# Altium PCB PCB_verticallanding_2024-01-02.pcbdoc
Units mil, origin at the board's own origin, x right, y up, seen from the top; angles counter-clockwise.
Board outline 4540 x 4185 mil, 2 copper layers (Top Layer, Bottom Layer); 88 components, 64 nets, 309 pads, 122 vias.
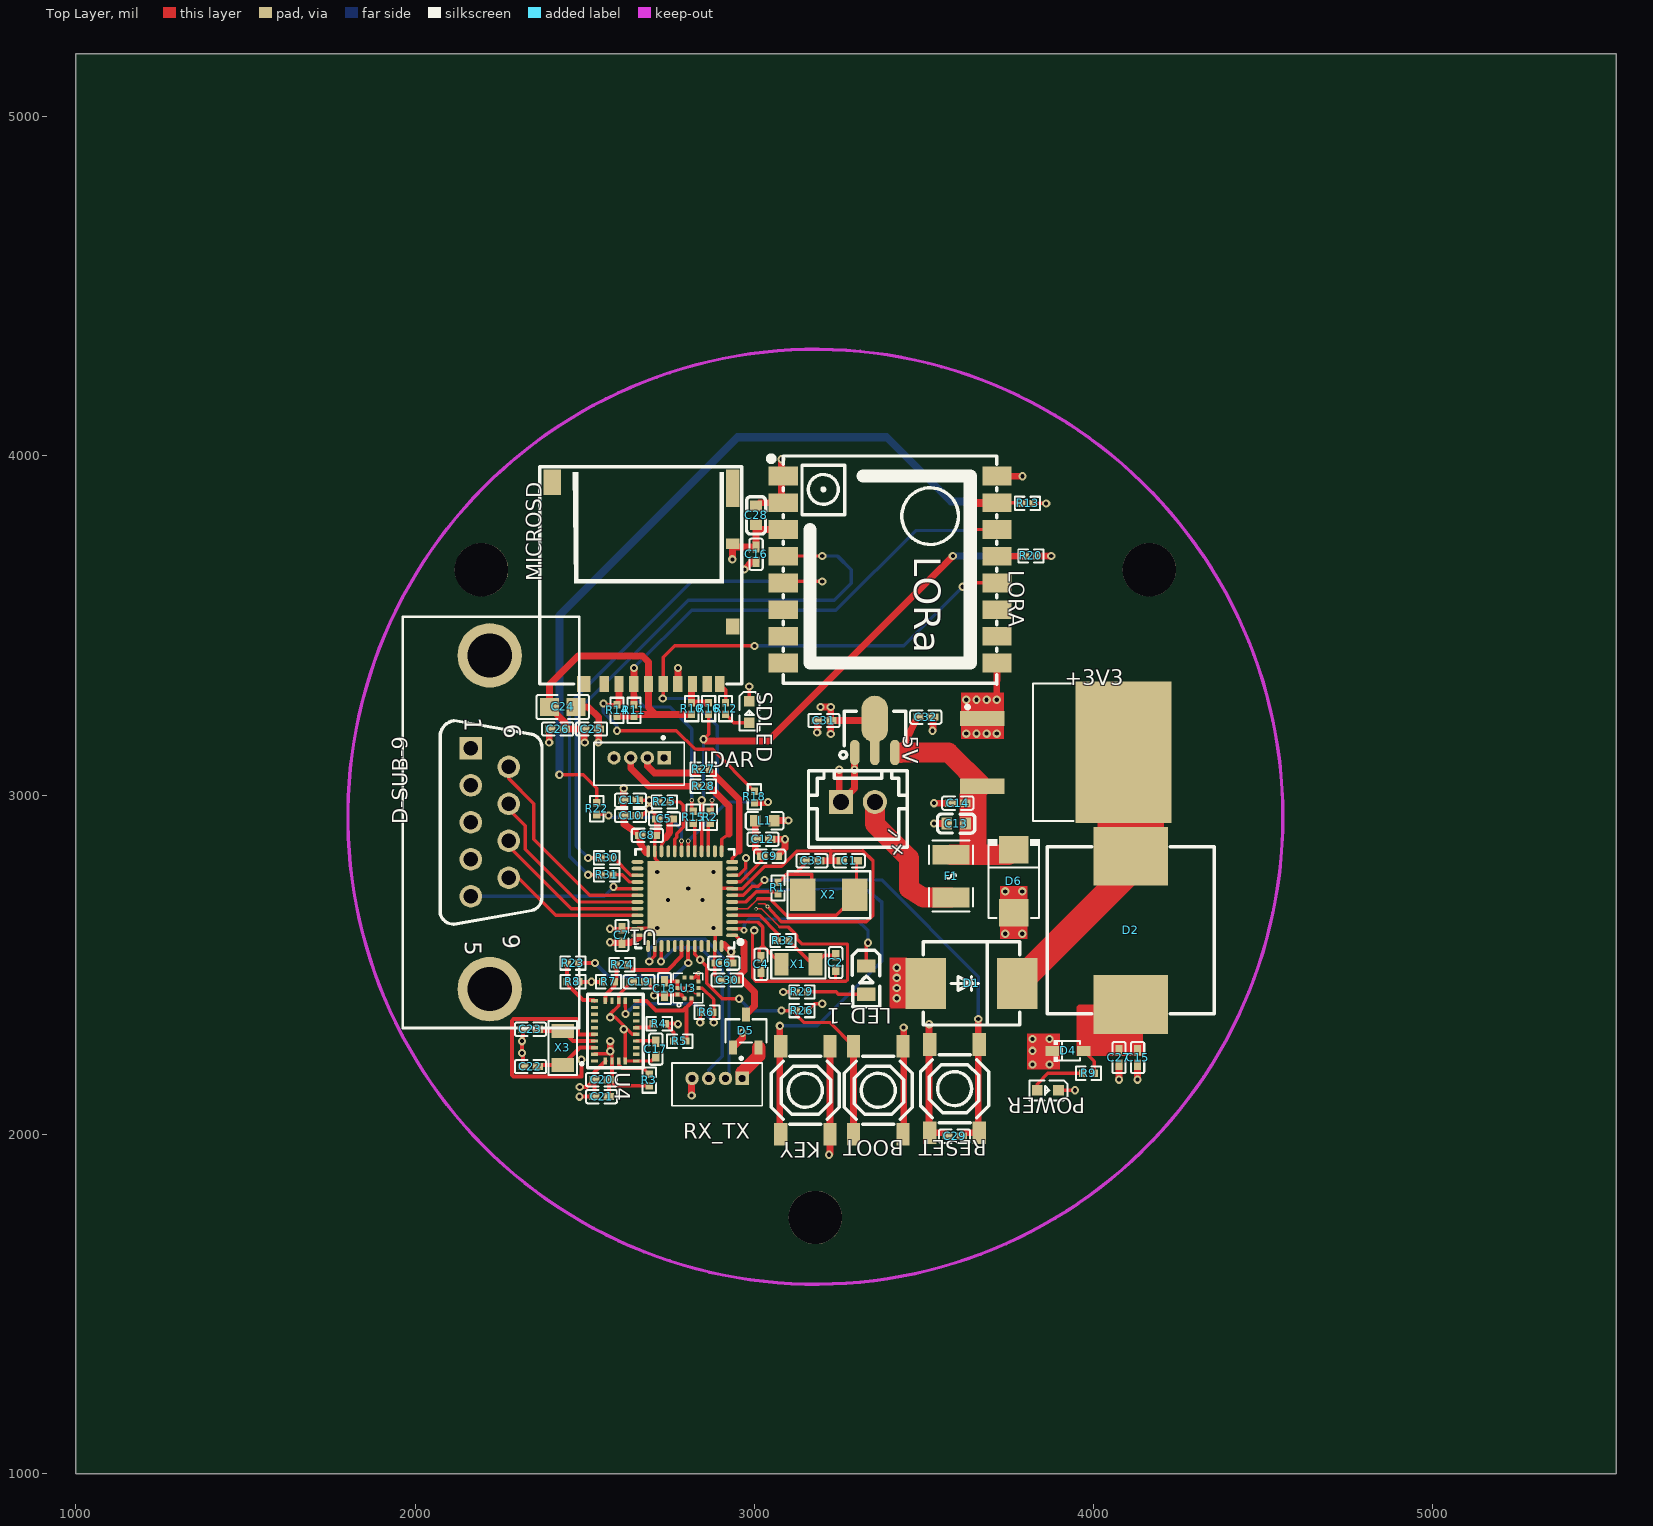
[diagram p0: Top Layer view]
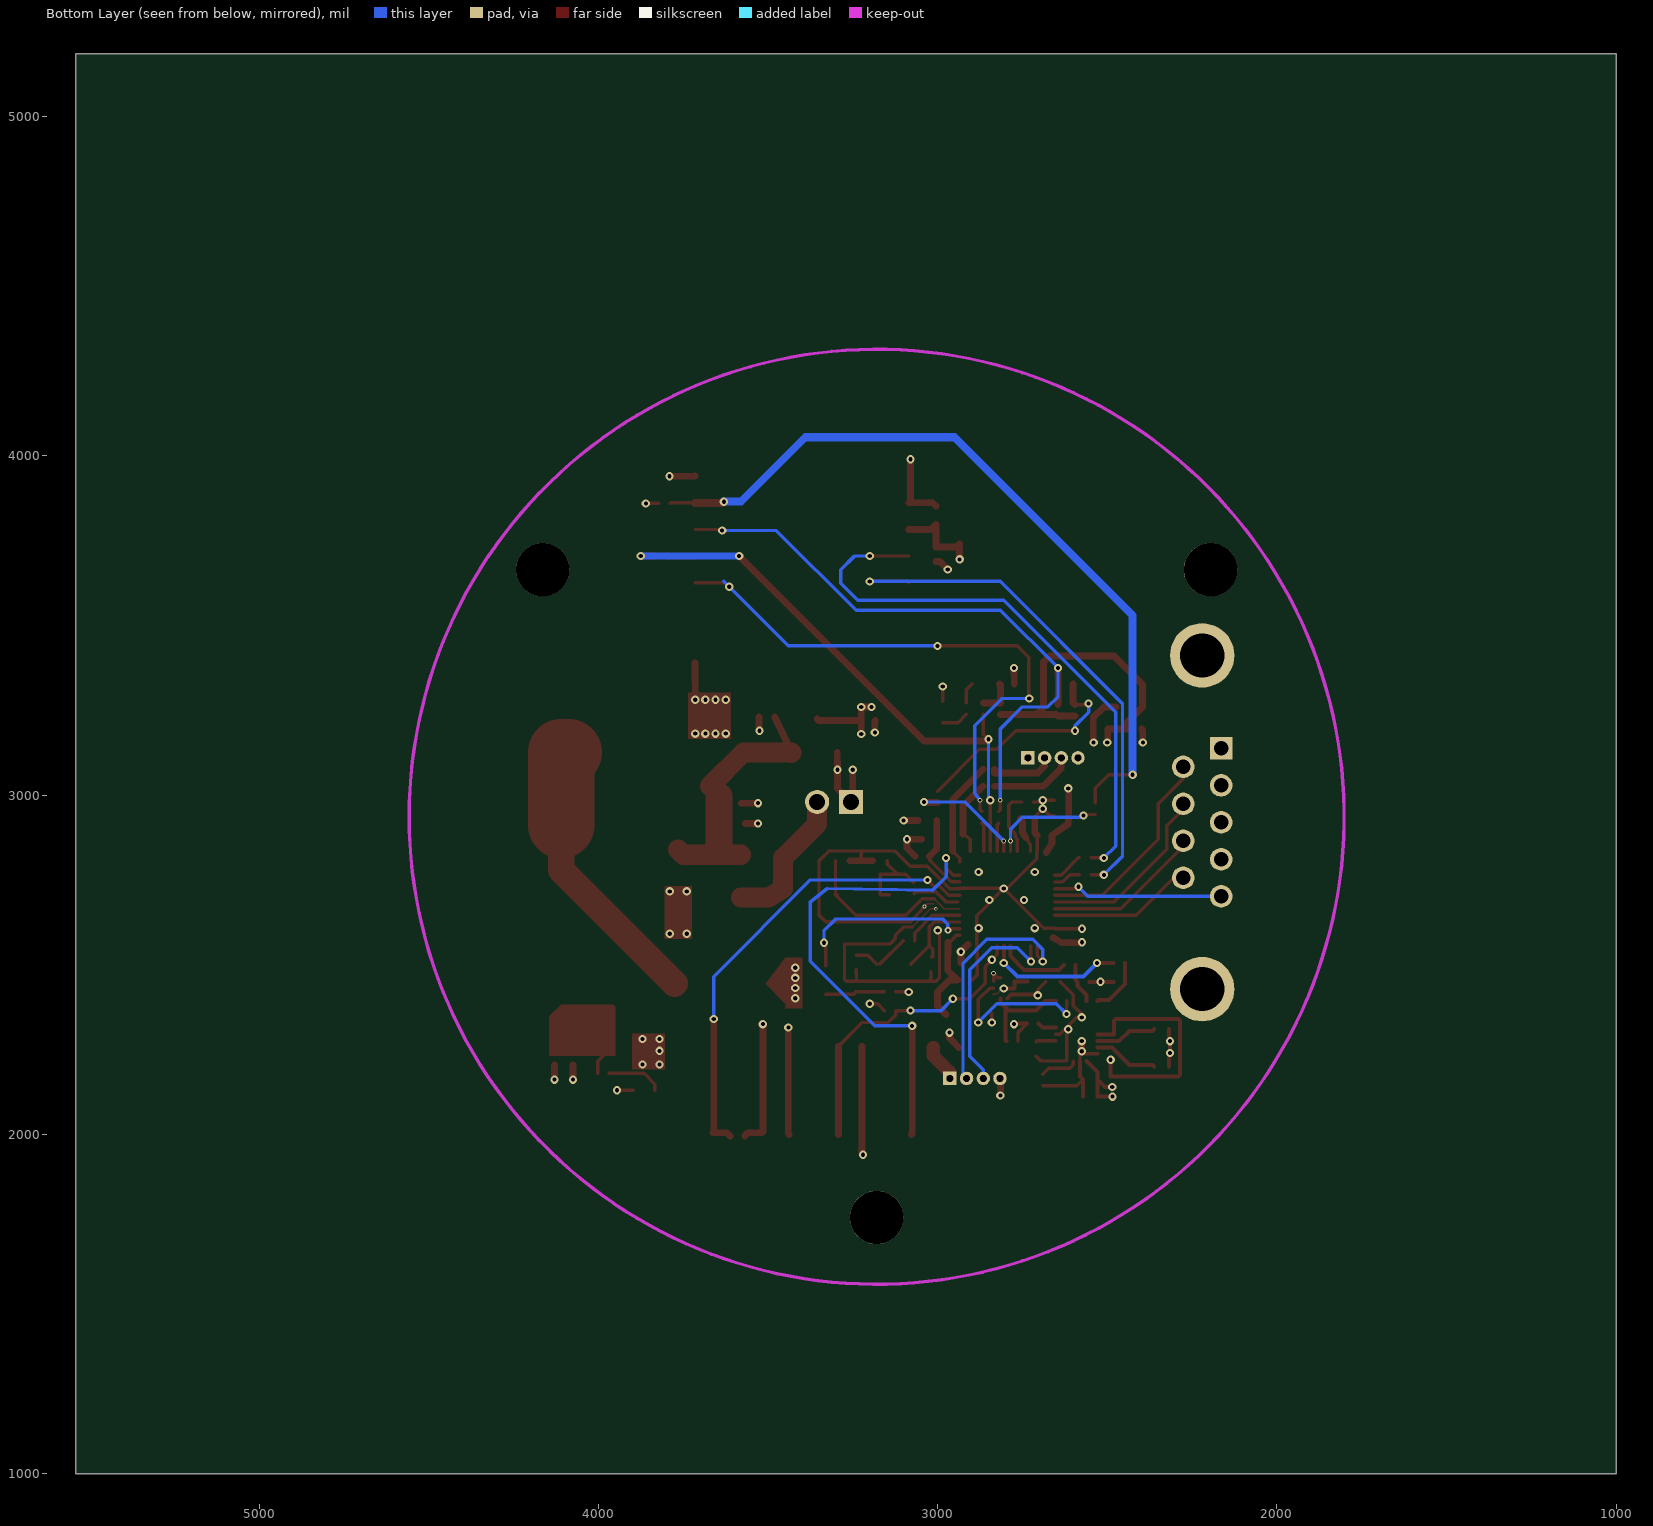
[diagram p1: Bottom Layer view, seen from below]

## Layer stack, top to bottom
Top Layer: signal copper (thickness not stored)
Dielectric: dielectric 12.6, FR-4, Dk 4.8
Bottom Layer: signal copper (thickness not stored)

## Board outline
5540,1000 1000,1000 1000,5185 5540,5185

## Components (designator, comment, footprint, x,y, rotation, side; value= is the part's Value field where it differs from the comment)
5V "LM1117-5V" SOT-89-3_L4.5-W2.5-P1.50-LS4.1-BR 3355,3175 r270 top
+3V3 "LD1085D2T33R" TO-263-2_L10.0-W9.1-P5.08-LS15.2-TL 3879.53,3126.41 r0 top
+_ "POWER INPUT" CONN-TH_B2B-XH-A-GU 3305,2980 r180 top
BOOT "TS-1187A-B-A-B" SW-SMD_4P-L5.1-W5.1-P3.70-LS6.5-TL-2 3365,2130 r90 top
C1 "20pF" C0402 3279.53,2806.41 r0 top
C2 "10pF" C0402 3239.53,2506.41 r90 top
C4 "10pF" C0402 3019.53,2501.41 r90 top
C5 "4.7uF" C0402 2735,2930 r0 top
C6 "100nF" C0402 2910,2505 r0 top
C7 "100nF" C0402 2609.53,2586.41 r270 top
C8 "100nF" C0402 2684.53,2881.41 r180 top
C9 "100nF" C0402 3045,2820 r180 top
C10 "4.7uF" C0402 2635,2940 r0 top
C11 "4.7uF" C0402 2635,2985 r0 top
C12 "1uF" C0402 3025,2870 r180 top
C13 "10uF" C0603 3594.53,2916.41 r180 top
C14 "100nF" C0402 3599.53,2976.41 r0 top
C15 "10uF" C0402 4129.53,2226.41 r90 top
C16 "100nF" C0402 3005,3710 r90 top
C17 "100nF" C0402 2709.53,2251.41 r90 top
C18 "100nF" C0402 2735,2430 r270 top
C19 "100nF" C0402 2660,2450 r0 top
C20 "100nF" C0402 2549.53,2161.41 r0 top
C21 "100nF" C0402 2549.53,2111.41 r0 top
C22 "22pF" C0402 2340,2200 r180 top
C23 "22pF" C0402 2340,2310 r180 top
C24 "47uF" C0805 2435,3260 r0 top
C25 "1uF" C0402 2520,3195 r0 top
C26 "100nF" C0402 2420,3195 r0 top
C27 "100nF" C0402 4074.53,2226.41 r270 top
C28 "10uF" C0603 3005,3825 r90 top
C29 "100nF" C0402 3590,1995 r0 top
C30 "100nF" C0402 2920,2455 r180 top
C31 "10uF" C0402 3205,3220 r0 top
C32 "10uF" C0402 3505,3230 r0 top
C33 "20pF" C0402 3169.53,2806.41 r180 top
D1 "SS34" SMC_L7.1-W6.2-LS8.1-R-RD 3640,2445 r180 top
D2 "10uH" IND-SMD_L12.5-W12.5-SRR1280-150M 4109.53,2601.41 r270 top
D4 "BAT60JFILM" SOD-323_L1.8-W1.3-LS2.5-RD 3924.53,2246.41 r0 top
D5 "BAT54C" SOT-23-3_L2.9-W1.6-P1.90-LS2.8-BR 2975,2305 r270 top
D6 "S3A" SMB_L4.6-W3.6-LS5.3-RD 3764.53,2746.41 r270 top
D-SUB-9 "DS1034-09FUNSi44" DSUB-TH_2-5747706-0 2220,2920 r90 top
F1 "FUSE 3A PTC" F1210 3579.53,2761.41 r270 top
KEY "TS-1187A-B-A-B" SW-SMD_4P-L5.1-W5.1-P3.70-LS6.5-TL-2 3150,2130 r90 top
L1 "600Ω" L0603 3030,2925 r180 top
LED_1 "0805G (Green)" LED0805-R-RD 3330,2455 r270 top
LIDAR "LIDAR" MOLEX_0530470410 2660,3110 r0 top
LORA "RA-02" WIRELM-SMD_RA-02-BL 3400,3665 r270 top
MICROSD "DM3AT-SF-PEJM5" SD-SMD_DM3AT-SF-PEJM5 2670,3625 r180 top
POWER "POWER INDICATOR" LED0603-RD 3864.95,2129.99 r180 top
R1 "330Ω" R0402 3069.53,2726.41 r270 top
R2 "22Ω" R0402 2870,2935 r270 top
R3 "10kΩ" R0402 2690,2160 r90 top
R4 "10kΩ" R0402 2719.53,2326.41 r180 top
R5 "4.7kΩ" R0402 2780,2275 r0 top
R6 "4.7kΩ" R0402 2860,2360 r0 top
R7 "2.2kΩ" R0402 2570,2450 r180 top
R8 "2.2kΩ" R0402 2465,2450 r0 top
R9 "200Ω" R0402 3985,2180 r180 top
R10 "47kΩ" R0402 2815,3255 r90 top
R11 "47kΩ" R0402 2645,3250 r90 top
R12 "100Ω" R0402 2915,3255 r270 top
R13 "10kΩ" R0402 3805,3860 r0 top
R14 "47kΩ" R0402 2595,3250 r90 top
R15 "22Ω" R0402 2820,2935 r270 top
R16 "22Ω" R0402 2865,3255 r90 top
R18 "22Ω" R0402 3000,2995 r90 top
R20 "22Ω" R0402 3815,3705 r180 top
R22 "22Ω" R0402 2535,2960 r90 top
R23 "22Ω" R0402 2465,2505 r0 top
R24 "22Ω" R0402 2610,2500 r0 top
R25 "10kΩ" R0402 2735,2980 r0 top
R26 "10kΩ" R0402 3140,2365 r0 top
R27 "22Ω" R0402 2849.53,3076.41 r180 top
R28 "22Ω" R0402 2849.53,3026.41 r180 top
R29 "100Ω" R0402 3140,2420 r0 top
R30 "22Ω" R0402 2565,2815 r180 top
R31 "22Ω" R0402 2565,2765 r180 top
R32 "470Ω" R0402 3084.53,2571.41 r180 top
RESET "TS-1187A-B-A-B" SW-SMD_4P-L5.1-W5.1-P3.70-LS6.5-TL-2 3590,2135 r270 top
RX_TX "TTL" MOLEX_0530470410 2890,2165 r0 top
SDLED "KT-0603R" LED0603-RD 2985,3245 r270 top
U1 "STM32F411CEU6TR" UFQFPN-48_L7.0-W7.0-P0.50-BL-EP5.6 2795,2695 r90 top
U3 "BMP390" LGA-10_L2.0-W2.0-P0.50-BL 2804.53,2431.41 r0 top
U4 "BNO085" LGA-28_L5.2-W3.8-P0.50-BL-1 2589.99,2305 r0 top
X1 "32.768K-9F" CRYSTAL-SMD_L3.2-W1.5-1 3129.53,2501.41 r0 top
X2 "25MHz 18pF" OSC-SMD_2P-L5.0-W3.2 3219.53,2706.41 r180 top
X3 "32.768KHZ-12.5PF" CRYSTAL-SMD_L3.2-W1.5-1 2435,2255 r90 top

## Footprints (in the part's own frame and the unit in brackets; to place one, negate y for a bottom-side part, rotate by r counter-clockwise, add the part's x,y. Pads: shape width x height; smd on the part's side, far side on the other; paste and mask are expansions set on the pad)
C0402 [mm]
  rect 0.79x0.54 smd paste-100 mask+0.051: 1(-0.545,0) 2(0.545,0)
  silkscreen extent -1.17,-0.5 1.17,0.5
C0603 [mm]
  rect 0.8x0.9 smd paste+0 mask+0.051: 1(-0.7,0) 2(0.7,0)
  silkscreen extent -1.41,-0.71 1.39,0.72
C0805 [mm]
  rect 1.41x1.35 smd paste-100 mask+0.051: 1(-1,0) 2(1,0)
  silkscreen extent -1.96,-0.9 1.96,0.9
CONN-TH_B2B-XH-A-GU [mm]
  rect 1.8x1.8 hole 1.2 paste+0 mask+0.051: 1(1.27,0)
  round 1.8 hole 1.2 paste+0 mask+0.051: 2(-1.27,0)
  silkscreen extent -3.7,-2.35 3.7,3.4
CRYSTAL-SMD_L3.2-W1.5-1 [mm]
  rect 1.05x1.7 smd paste+0 mask+0.051: 1(-1.275,0) 2(1.275,0)
  silkscreen extent -2.03,-1.08 2.03,1.08
DSUB-TH_2-5747706-0 [mm]
  rect 1.69x1.69 hole 1.09 paste+0 mask+0.051: 1(5.54,1.42)
  round 1.69 hole 1.09 paste+0 mask+0.051: 2(2.77,1.42) 3(0,1.42) 4(-2.77,1.42) 5(-5.54,1.42) 6(4.155,-1.42) 7(1.385,-1.42) 8(-1.385,-1.42) 9(-4.155,-1.42)
  round 4.826 hole 3.302 paste+0 mask+0.051: 10(12.495,0) 11(-12.495,0)
  silkscreen extent -15.4,-6.7 15.4,6.51
F1210 [mm]
  rect 1.485x2.781 smd paste-100 mask+0.051: 1(-1.6,0) 2(1.6,0)
  silkscreen extent -2.67,-1.65 2.67,1.65
IND-SMD_L12.5-W12.5-SRR1280-150M [mm]
  rect 4.4x5.6 smd paste+0 mask+0.051: 1(-5.55,0) 2(5.55,0)
  silkscreen extent -6.25,-6.25 6.25,6.25
L0603 [mm]
  rect 0.8x0.864 smd paste-100 mask+0.051: 1(-0.7,0) 2(0.7,0)
  silkscreen extent -1.42,-0.65 1.41,0.67
LED0603-RD [mm]
  rect 0.8x0.8 smd paste+0 mask+0.051: 1(-0.799,-0.003) 2(0.799,0.004)
  silkscreen extent -1.49,-0.75 1.39,0.76
LED0805-R-RD [mm]
  rect 1x1.4 smd paste+0 mask+0.051: 1(1.05,0) 2(-1.05,0)
  silkscreen extent -2.22,-1.04 1.99,1.01
LGA-10_L2.0-W2.0-P0.50-BL [mm]
  rect 0.3x0.3 smd paste+0 mask+0.05: 1(-0.25,-0.78) 2(0.25,-0.78) 3(0.78,-0.5) 4(0.78,0) 5(0.78,0.5) 6(0.25,0.78) 7(-0.25,0.78) 8(-0.78,0.5) 9(-0.78,0) 10(-0.78,-0.5)
  silkscreen extent -1.1,-1.4 1.1,1.1
LGA-28_L5.2-W3.8-P0.50-BL-1 [mm]
  rect 0.5x0.25 smd paste+0 mask+0.051: 1(-1.563,-2.25) 6(1.563,-2.25) 7(1.563,-1.75) 8(1.563,-1.25) 9(1.563,-0.75) 10(1.563,-0.25) 11(1.563,0.25) 12(1.563,0.75) 13(1.563,1.25) 14(1.563,1.75) 15(1.563,2.25) 20(-1.563,2.25) 21(-1.563,1.75) 22(-1.563,1.25) 23(-1.563,0.75) 24(-1.563,0.25) 25(-1.563,-0.25) 26(-1.563,-0.75) 27(-1.563,-1.25) 28(-1.563,-1.75)
  rect 0.25x0.5 smd paste+0 mask+0.051: 2(-0.75,-2.25) 3(-0.25,-2.25) 4(0.25,-2.25) 5(0.75,-2.25) 16(0.75,2.25) 17(0.25,2.25) 18(-0.25,2.25) 19(-0.75,2.25)
  silkscreen extent -2.6,-2.75 2.08,2.75
MOLEX_0530470410 [mil]
  rect 39.69x39.69 hole 19.68 slot 19.88 at 0 deg paste+0 mask+2: 1(73.82,0)
  round 39.69 hole 19.68 slot 19.88 at 0 deg paste+0 mask+2: 2(24.61,0) 3(-24.61,0) 4(-73.82,0)
  silkscreen extent -133,-81 133,63
OSC-SMD_2P-L5.0-W3.2 [mm]
  rect 1.9x2.4 smd paste+0 mask+0.051: 1(-1.95,0) 2(1.95,0)
  silkscreen extent -3.1,-1.75 3.1,1.75
R0402 [mm]
  rect 0.566x0.54 smd paste-100 mask+0.051: 1(-0.433,0) 2(0.433,0)
  silkscreen extent -0.94,-0.5 0.94,0.5
SD-SMD_DM3AT-SF-PEJM5 [mm]
  rect 0.7x1.2 smd paste+0 mask+0.051: 1(2.85,7.55) 2(1.75,7.55) 3(0.65,7.55) 4(-0.45,7.55) 5(-1.55,7.55) 6(-2.65,7.55) 7(-3.75,7.55) 8(-4.85,7.55) 9(-5.8,7.55)
  rect 1x1.2 smd paste+0 mask+0.051: 10(-6.75,3.25) 14(4.4,7.55)
  rect 1x0.8 smd paste+0 mask+0.051: 11(-6.75,-2.95)
  rect 1x2.8 smd paste+0 mask+0.051: 12(-6.75,-7.1)
  rect 1.3x1.9 smd paste+0 mask+0.051: 13(6.75,-7.55)
  silkscreen extent -7.44,-8.71 7.68,7.55
SMB_L4.6-W3.6-LS5.3-RD [mil]
  rect 80.61x86.31 smd paste+0 mask+2: 1(-92.94,0) 2(92.94,0)
  silkscreen extent -123,-77 108,77
SMC_L7.1-W6.2-LS8.1-R-RD [mm]
  rect 3.03x3.82 smd paste+0 mask+0.051: 1(3.435,0) 2(-3.435,0)
  silkscreen extent -3.6,-3.11 3.6,3.11
SOD-323_L1.8-W1.3-LS2.5-RD [mm]
  rect 1x0.75 smd paste+0 mask+0.051: 1(-1.173,0) 2(1.173,0)
  silkscreen extent -1.08,-0.8 0.9,0.8
SOT-23-3_L2.9-W1.6-P1.90-LS2.8-BR [mm]
  rect 1.07x0.6 smd paste+0 mask+0.051: 1(1.235,-0.95) 2(1.235,0.95) 3(-1.235,0)
  silkscreen extent -0.88,-1.54 0.88,1.54
SOT-89-3_L4.5-W2.5-P1.50-LS4.1-BR [mm]
  oval 1.9x0.7 smd paste-100 mask+0.051: 1(1.25,-1.501) 3(1.25,1.501)
  oval 3.5x2 smd paste-100 mask+0.051: 2(-1.25,0)
  oval 2.1x0.7 smd paste-100 mask+0.051: 2(1.151,0)
  silkscreen extent -1.85,-2.61 1.68,2.3
SW-SMD_4P-L5.1-W5.1-P3.70-LS6.5-TL-2 [mm]
  rect 1.7x1 smd paste+0 mask+0.051: 1(-3.3,1.85) 2(3.3,1.85) 3(-3.3,-1.85) 4(3.3,-1.85)
  silkscreen extent -2.55,-2.55 2.55,2.55
TO-263-2_L10.0-W9.1-P5.08-LS15.2-TL [mil]
  rect 132.23x44.65 smd paste+0 mask+2: 1(-208.1,100) 3(-208.1,-100)
  rect 282.7x416 smd paste+0 mask+2: 4(208.1,0)
  silkscreen extent -256,-203 61,203
UFQFPN-48_L7.0-W7.0-P0.50-BL-EP5.6 [mm]
  oval 0.28x0.9 smd paste-100 mask+0.051: 1(-2.751,-3.547) 2(-2.25,-3.547) 3(-1.75,-3.547) 4(-1.25,-3.547) 5(-0.749,-3.547) 6(-0.249,-3.547) 7(0.249,-3.547) 8(0.749,-3.547) 9(1.25,-3.547) 10(1.75,-3.547) 11(2.251,-3.547) 12(2.751,-3.547) 25(2.751,3.547) 26(2.251,3.547) 27(1.75,3.547) 28(1.25,3.547) 29(0.749,3.547) 30(0.249,3.547) 31(-0.249,3.547) 32(-0.749,3.547) 33(-1.25,3.547) 34(-1.75,3.547) 35(-2.25,3.547) 36(-2.751,3.547)
  oval 0.9x0.28 smd paste-100 mask+0.051: 13(3.547,-2.75) 14(3.547,-2.25) 15(3.547,-1.75) 16(3.547,-1.25) 17(3.547,-0.75) 18(3.547,-0.25) 19(3.547,0.25) 20(3.547,0.75) 21(3.547,1.25) 22(3.547,1.75) 23(3.547,2.25) 24(3.547,2.75) 37(-3.547,2.751) 38(-3.547,2.25) 39(-3.547,1.75) 40(-3.547,1.25) 41(-3.547,0.749) 42(-3.547,0.249) 43(-3.547,-0.249) 44(-3.547,-0.749) 45(-3.547,-1.25) 46(-3.547,-1.75) 47(-3.547,-2.25) 48(-3.547,-2.751)
  rect 5.6x5.6 smd paste-100 mask+0.051: 49(0,0)
  silkscreen extent -3.7,-4.3 3.7,3.7
WIRELM-SMD_RA-02-BL [mm]
  rect 1.4x2.2 smd paste+0 mask+0.051: 1(-7,-8) 2(-5,-8) 3(-3,-8) 4(-1,-8) 5(1,-8) 6(3,-8) 7(5,-8) 8(7,-8) 9(7,8) 10(5,8) 11(3,8) 12(1,8) 13(-1,8) 14(-3,8) 15(-4.998,8) 16(-7,8)
  silkscreen extent -8.5,-9.1 8.6,8

## Free pads (board coordinates)
  round 157.48 hole 157.48 unplated paste+0: ""(2195.48,3664.64) ""(3179.73,1755.19) ""(4163.98,3664.64)

## Via types
v1: diameter 24.41, hole 12.2, Top Layer to Bottom Layer, tented both sides, 114 vias
v2: diameter 13.78, hole 7.87, Top Layer to Bottom Layer, tented both sides, 5 vias
v3: diameter 19.69, hole 9.84, Top Layer to Bottom Layer, tented both sides, 1 vias
v4: diameter 11.81, hole 5.91, Top Layer to Bottom Layer, tented both sides, 1 vias
v5: diameter 10, hole 5.91, Top Layer to Bottom Layer, tented both sides, 1 vias

## Nets (pads, with @x,y where several pads share a name; then routed paths per layer and width w, separated by ;. In a path a pad name is that pad's centre, name@x,y a point inside that pad or via, vN(x,y) a via of type N, cw(c..) or ccw(c..) an arc to the next point about the centre after c; other vN are vias at no path point)
+3V3: BOOT.3 BOOT.4 C6.2 C7.2 C8.2 C10.1 C11.1 C16.2 C18.2 C19.2 C20.2 C21.2 C24.1 C25.1 C26.2 C28.1 D4.1 D5.1 D-SUB-9.1 D-SUB-9.2 L1.1 LORA.3 MICROSD.4 MICROSD.11 R3.1 R4.1 R5.1 R6.1 R7.2 R8.2 R10.1 R11.1 R13.2 R14.1 R29.1 U1.24 U1.36 U1.48 U3.1 U3.5 U3.6 U3.10 U4.3 U4.28 | length 2838.1
  Top Layer w10: U4.28@2528.03,2237.51 2580.13,2237.51 U4.3@2580.13,2216.41 ; C20.2 2589.44,2142.95 R3.1 ; C19.2 2705,2426.46 v1(2705,2409.99) ; R4.1 2762.95,2300.03 R5.1 ; U3.6 2822.13,2462.12 v2(2835,2474.99) 2835,2451.34 U3.5 ; v1(2840,2329.99) 2840,2357.05 R6.1 ; v1(3085,2419.99) R29.1 ; R13.2 v1(3860,3859.99)
  Top Layer w11.81: R8.2 v1(2520,2449.99) R7.2 ; C21.2 C20.2 ; C20.2 2580.17,2170.56 U4.3 ; v1(2705,2409.99) 2706.73,2411.72 U3.10 2783.67,2411.72 U3.1 ; R4.1 2773.58,2326.41 v1(2775,2324.99)
  Top Layer w20: v1(2500,3154.99) 2498.54,3156.46 C25.1 C26.2 2441.46,3214.18 C24.1 2395.64,3325.64 2480,3410 2670,3410 2687.71,3392.29 MICROSD.4 2687.71,3258.35 2708.11,3237.95 ; v1(2574.53,2566.41) 2575.98,2564.96 C7.2 ; v1(2575,2244.99) v1(2575,2274.99) ; R14.1 R11.1 2650,3237.95 2720.3,3237.95 2759.56,3237.95 R10.1 ; C7.2@2609.53,2565.41 2633.6,2564.96 2660,2580 ; v1(2615,3019.99) 2613.54,3018.53 C10.1 2615,2915 C8.2 2663.03,2858.35 2680,2830 ; 2910.03,2560.01 v1(2931.43,2538.61) C6.2@2931.43,2505.01 ; v1(2935,3694.99) MICROSD.11 ; MICROSD.11 2945.43,3731.46 C16.2 C28.1 3019.33,3783.11 LORA.3 ; D5.1 2965,2283.78 v1(2965,2299.99) ; L1.1 v1(3100,2924.99) ; BOOT.3 3440,2002.24 v1(3440,2314.99)
  other v1: 3819.53,2206.41 3869.53,2206.41 3819.53,2246.41 3819.53,2281.41 3869.53,2281.41
+5V: 5V.2 C31.2 LIDAR.1 | length 763.6
  Top Layer w20: v1(3195,3259.99) v1(3225,3259.99) v1(3225,3179.99) ; C31.2 3350.81,3220.01 5V.2@3355,3224.2
  Mid-Layer 2 w20: LIDAR.1 2883.83,3260.01 v1(3195,3259.99)
BNO085_SCL: R7.1 R24.1 U4.19 | length 119.9
  Top Layer w11.81: U4.19 2560.48,2410.47 2587.05,2437.05 R7.1 2592.96,2455.91 R24.1
BNO085_SDA: R8.1 R23.1 U4.20 | length 163
  Top Layer w11.81: R23.1 R8.1 2447.96,2442.99 2494.53,2396.41 2525.64,2396.41 U4.20@2528.47,2393.59
BNO085_XIN: C22.1 U4.27 X3.1 | length 190.1
  Top Layer w11.81: C22.1 2366.26,2204.8 X3.1 2486,2255.8 U4.27
BNO085_XOUT: C23.1 U4.26 X3.2 | length 181.3
  Top Layer w11.81: C23.1 2366.26,2305.2 X3.2 2464.72,2275.47 U4.26
BOOT0: BOOT.1 BOOT.2 R26.1 U1.44 | length 901.3
  Top Layer w10: U1.44 2824.5,2530.5 v1(2840,2514.99) ; v1(2840,2514.99) 2860.03,2495.01 2860.03,2445.01 2905.05,2399.99 v1(2955,2399.99) ; v1(3080,2364.99) R26.1 3122.96,2352.04 3145,2330 3202.22,2329.99 3222.09,2329.99 BOOT.2
  Top Layer w20: BOOT.1 BOOT.2
  Bottom Layer w10: v1(2955,2399.99) 2990,2365 v1(3080,2364.99)
C27_1: C15.2 C27.1 D2.2 D4.2 R9.1 | length 79.4
  Top Layer w10: D4.2 4002.05,2215.06 R9.1
CARD1_9: MICROSD.9 R12.1 | length 62.6
  Top Layer w10: MICROSD.9 2915,3311.1 R12.1
D1_2: +3V3.4 D1.2 D2.1 | length 750.3
  Top Layer w78.74: D1.2 4109.53,2779.28 D2.1
  Top Layer w196.85: +3V3.4 4109.53,3126.41 4109.53,2911.41
ENV_SCL: R5.2 U3.2 U4.15 | length 296.1
  Top Layer w11.81: U4.15 2681.46,2393.59 2710.03,2365.02 2790.03,2365.02 2814.33,2389.41 U3.2@2814.33,2400.71 ; R5.2 2799.14,2277.1 2799.14,2374.17
ENV_SDA: R6.2 U3.4 U4.16 | length 460.4
  Top Layer w10: U4.16 v1(2620,2354.99) ; U3.4 2846.43,2431.41 2880,2397.84 v1(2880,2329.99)
  Bottom Layer w10: v1(2620,2354.99) 2650,2385 2825,2385 v1(2880,2329.99)
GND: 5V.1 +3V3.1 +_.1 C1.1 C2.1 C4.1 C5.1 C6.1 C7.1 C8.1 C9.1 C10.2 C11.2 C12.1 C13.2 C14.1 C15.1 C16.1 C17.1 C18.1 C19.1 C20.1 C21.1 C22.2 C23.2 C24.2 C25.2 C26.1 C27.2 C28.2 C29.1 C30.2 C31.1 C32.2 C33.1 D1.1 D6.2 D-SUB-9.3 D-SUB-9.4 D-SUB-9.10 D-SUB-9.11 KEY.3 KEY.4 LIDAR.4 LORA.1 LORA.2 LORA.9 LORA.16 MICROSD.6 POWER.1 R25.1 R26.2 RESET.3 RESET.4 RX_TX.4 SDLED.1 U1.8 U1.23 U1.35 U1.47 U1.49 U3.3 U3.8 U3.9 U4.2 U4.5 U4.6 U4.10 U4.17 U4.25 | length 6927.7
  Top Layer w5: v1(2805,2429.99) 2810.03,2430.01 2825.03,2415.01 2835.23,2415.01 U3.3 ; v5(3005,2664.99) 3020.93,2665.01 3074.53,2611.41 ; 3011.15,2679.99 3030.03,2679.99 v4(3038.79,2671.24)
  Top Layer w10: v1(2574.53,2606.41) U1.35 ; v1(2615,2309.99) 2619.53,2309.99 U4.5 2649.65,2216.43 U4.6@2651.06,2217.83 ; C19.1 2599.84,2411.31 U4.17 2599.83,2379.83 2575,2355 v1(2575,2344.99) 2590.01,2344.99 2639.84,2295.16 U4.10 ; C10.2 2670,2940 v1(2690,2959.99) ; C11.2 v1(2690,2984.99) ; U1.35@2656.65,2607.17 2687.17,2607.17 v1(2805,2724.99) ; C8.1 2705.99,2835.08 U1.23 ; U1.23@2707.73,2835.41 2707.73,2812.22 2795.03,2725.01 v1(2805,2724.99) ; C5.1 2713.54,2936.46 v1(2690,2959.99) ; R25.1 2694.99,2980.01 v1(2690,2984.99) ; U1.47 2883.6,2469.95 C30.2 ; U1.47@2884.91,2556.11 2884.91,2645.08 v1(2805,2724.99) ; U1.8@2934.63,2724.51 2964.53,2724.51 3030.03,2790.01 3080.03,2790.01 3125.03,2835.01 3319.53,2836.41 3349.53,2806.41 3349.53,2646.41 3329.53,2626.41 3079.53,2626.41 v4(3038.79,2671.24) ; U1.8@2935.97,2725.27 2805.27,2725.27 v1(2805,2724.99) ; SDLED.1@2984.83,3276.51 v1(2985,3319.99) ; v1(2999.53,2601.41) 2994.53,2596.41 2994.53,2461.41 3004.53,2451.41 3269.53,2451.41 3274.53,2456.41 3274.53,2561.41 3139.53,2561.41 3124.53,2576.41 3124.53,2586.41 3099.53,2611.41 3074.53,2611.41 ; C4.1@3019.53,2479.91 3020.13,2451.41 ; R26.2 3177.03,2385 v1(3200,2384.99) ; 3224.63,2835.72 3225.03,2806.41 ; 3239.13,2451.41 C2.1@3239.53,2484.91 ; POWER.1 v1(3945,2129.99) ; v1(2690,2959.99) v1(2690,2984.99)
  Top Layer w10.16: U4.6 2695.99,2216.41 C17.1
  Top Layer w11.81: C22.2 2318.54,2236.46 v1(2315,2239.99) v1(2315,2274.99) 2318.54,2278.53 C23.2 ; v1(2484.53,2111.41) C21.1 C20.1 ; v1(2485,2139.99) 2506.64,2139.99 C20.1 ; v1(2490,2219.99) 2490,2170.02 2290.03,2170.02 2285.03,2175.02 2285.03,2335.02 2290.03,2340.02 2475.03,2340.02 2480.43,2334.52 2480.43,2295.16 U4.25 ; U4.2 2528.07,2184.01 C20.1 ; C18.1@2735.03,2451.41 U3.8 ; U3.8 U3.9 2775.24,2429.99 v1(2805,2429.99)
  Top Layer w20: v1(2395,3154.99) 2395,3191.46 C26.1 ; C24.2 2510,3260 2541.46,3228.54 C25.2 2541.46,3156.46 v1(2540,3154.99) ; C8.1 2713.54,2888.96 C5.1 ; MICROSD.6@2774.33,3327.72 v1(2775,3374.99) ; v1(2815,2114.99) 2815,2163.81 RX_TX.4 ; v1(2970,3664.99) 2993.54,3688.54 C16.1 ; C28.2 3014.3,3861.85 3085.04,3861.85 3080,3866.89 v1(3080,3989.99) ; C12.1 v1(3090,2869.99) 3090,2843.54 C9.1 ; C31.1 3185,3218.54 v1(3185,3184.99) ; C33.1 C1.1 ; v1(3220,1939.99) 3222.84,1942.85 KEY.3 KEY.4 ; v1(3250,3074.99) 3250,2985 +_.1 3295,3020.01 v1(3295,3074.99) ; v1(3295,3074.99) 5V.1 ; v1(3515,2324.99) 3515,2007.24 RESET.4 3558.46,2005.08 C29.1 ; v1(3525,3189.99) 3526.46,3191.46 C32.2 ; v1(3529.53,2916.41) C13.2 ; v1(3529.53,2976.41) C14.1 ; v1(3714.53,3281.41) LORA.9@3714.93,3389.41 ; LORA.16@3714.93,3940.61 v1(3790,3939.99) ; v1(4074.53,2161.41) C27.2 ; v1(4129.53,2161.41) C15.1
  other v1: 3419.53,2401.41 3419.53,2431.41 3419.53,2461.41 3419.53,2491.41 3739.53,2591.41 3789.53,2591.41 2713.64,2608.09 2879,2608.09 2745.14,2690.78 2847.5,2690.78 3739.53,2716.41 3789.53,2716.41 2713.64,2773.45 2879,2773.45 3624.53,3181.41 3654.53,3181.41 3684.53,3181.41 3714.53,3181.41 3624.53,3281.41 3654.53,3281.41 3684.53,3281.41
LED1_2: R12.2 SDLED.2 | length 80.3
  Top Layer w10: R12.2 2939.43,3213.53 SDLED.2
LED2_2: POWER.2 R9.2 | length 166.1
  Top Layer w10: POWER.2 3833.53,2148.53 3865,2180 R9.2
LED3_1: LED_1.1 R29.2 | length 175.6
  Top Layer w10: R29.2 3240.85,2419.99 3247.2,2413.64 LED_1.1
LIDAR_RX: LIDAR.2 R27.2 | length 192.3
  Top Layer w20: LIDAR.2 2684.63,3085.41 2705.03,3065.01 2832.53,3065.01 R27.2
LIDAR_TX: LIDAR.3 R28.2 | length 249.6
  Top Layer w20: LIDAR.3 2635.33,3079.82 2688.43,3026.41 R28.2
MISO1: R16.1 R20.1 U1.16 | length 1707.7
  Top Layer w10: U1.16 2845,2835.45 v1(2845,2984.99) ; v1(2850,3164.99) 2865,3180 R16.1
  Top Layer w20: v1(2850,3164.99) 2855,3160 3040,3160 v1(3585,3704.99) ; R20.1 v1(3875,3704.99)
  Bottom Layer w10: v1(2845,2984.99) 2850,2990 v1(2850,3164.99)
  Bottom Layer w20: v1(3585,3704.99) v1(3875,3704.99)
NRST: C29.2 RESET.1 RESET.2 U1.7 | length 1378.8
  Top Layer w10: U1.7 2967.51,2704.8 2993.78,2731.07 3011.07,2731.07 v1(3030,2749.99)
  Top Layer w20: C29.2 3621.54,2005.08 RESET.2 3660,2007.93 v1(3660,2339.99)
  Bottom Layer w10: v1(3030,2749.99) 3375.03,2750.01 3660.03,2465.01 v1(3660,2339.99)
PA0: KEY.1 KEY.2 U1.10 | length 1439.4
  Top Layer w10: U1.10@2934.63,2763.91 2953.93,2763.91 2975.03,2785.01 v1(2975,2814.99)
  Top Layer w20: v1(3075,2319.99) 3075,2002.23 KEY.1
  Bottom Layer w10: v1(2975,2814.99) 2975.03,2760.01 3015.03,2720.01 3325,2725 3375.03,2685.41 3375.03,2510.01 3185.03,2320.01 v1(3075,2319.99)
PA5: R2.2 U1.15 | length 85.8
  Top Layer w10: U1.15 2863.9,2911.86 R2.2
PA7: R15.2 U1.17 | length 85.2
  Top Layer w10: R15.2 2824.53,2913.42 U1.17
PA8: D-SUB-9.5 U1.29 | length 505.2
  Top Layer w10: v1(2585,2729.99) 2590.51,2724.49 U1.29
  Bottom Layer w10: D-SUB-9.5 2556.89,2701.89 v1(2585,2729.99)
PA9: D-SUB-9.6 U1.30 | length 618
  Top Layer w10: D-SUB-9.6 2275.93,3049.11 2350.03,2975.01 2350.03,2870.01 2515.23,2704.82 U1.30
PA10: D-SUB-9.7 U1.31 | length 549.3
  Top Layer w10: D-SUB-9.7 2275.93,2959.11 2325.03,2910.01 2325.03,2840.01 2479.83,2685.22 U1.31
PA11: D-SUB-9.8 U1.32 | length 471.8
  Top Layer w10: D-SUB-9.8 2275.93,2849.11 2459.53,2665.51 U1.32
PA12: D-SUB-9.9 U1.33 | length 425.2
  Top Layer w10: D-SUB-9.9 2303.63,2756.41 2414.23,2645.81 U1.33
PB0: R18.1 U1.18 | length 349.5
  Top Layer w10: U1.18@2805,2835 v2(2805,2864.99)
  Top Layer w20: R18.1 3037.96,2977.96 v1(3040,2979.99)
  Bottom Layer w10: v2@2807.78,2867.78 2920.01,2979.99 v1(3040,2979.99)
PB1: R22.1 U1.19 | length 336.3
  Top Layer w10: R22.1 2567.04,2942.95 v1(2570,2939.99) ; v2(2785,2864.99) U1.19@2785.13,2834.61
  Bottom Layer w10: v1@2575.03,2945.01 2575.03,2935.01 2750.23,2935.01 2785.13,2900.11 v2(2785,2864.99)
PB2: R25.2 U1.20 | length 187.6
  Top Layer w10: R25.2 2779.99,2980.01 2790,2970 2790,2905.06 2770.57,2885.62 2770.57,2875.57 2765.47,2870.47 U1.20
PB14: R30.1 U1.27 | length 94.5
  Top Layer w10: R30.1 2585,2815 2636.11,2763.89 U1.27
PB15: R31.1 U1.28 | length 81.9
  Top Layer w10: R31.1 2610,2765 2630.8,2744.2 U1.28
PC13: LED_1.2 U1.2 | length 547.2
  Top Layer w10: U1.2 2964.55,2606.39 v3(2969.53,2601.41) ; LED_1.2@3330,2496.34 3330,2559.99 v1(3335,2564.99)
  Bottom Layer w10: v3(2969.53,2601.41) 2969.53,2619.53 2985,2635 3300,2635 3335,2600 v1(3335,2564.99)
RA-02_CLK: LORA.12 MICROSD.5 R2.1 | length 1671.9
  Top Layer w10: v1(2730,3284.99) 2731.02,3286.02 MICROSD.5 2731.02,3406.02 2765,3440 v1(3000,3439.99) ; R2.1 2875,2957.04 v2(2875,2984.99) ; v1(3614.15,3614.14) 3625.63,3625.63 LORA.12
  Bottom Layer w10: v1(2730,3284.99) 2810.03,3285.01 2890.03,3205.01 2890,3005 v2(2875,2984.99) ; v1(3000,3439.99) 3440,3440 v1(3614.15,3614.14) 3630,3630
RA-02_DIO: LORA.5 R31.2 | length 1576.6
  Top Layer w10: v1(2510,2764.99) R31.2 ; LORA.5 3089.4,3630 v1(3200,3629.99)
  Bottom Layer w10: v1(2510,2764.99) 2455,2820 2455,3270 2815,3630 v1(3200,3629.99)
RA-02_MISO: LORA.13 R20.2 | length 83
  Top Layer w20: LORA.13@3714.93,3704.41 R20.2@3797.93,3705.01
RA-02_MOSI: LORA.14 MICROSD.3 R11.2 R15.1 | length 1891.4
  Top Layer w10: v2(2815,2984.99) 2815,2957.03 R15.1 ; v1(3635,3779.99) 3638.11,3783.11 LORA.14
  Top Layer w20: R11.2 2644.43,3327.72 v1(2645,3374.99)
  Bottom Layer w10: v2(2815,2984.99) 2815,3195 2750,3260 2675,3260 2645,3290 v1(2645,3374.99) 2815,3545 3240,3545 3475,3779.99 v1(3635,3779.99) v1@3630.01,3779.99
RA-02_RST: LORA.4 R30.2 | length 1706.4
  Top Layer w10: v1(2510,2814.99) R30.2 ; LORA.4@3085,3705 v1@3200,3705.6
  Bottom Layer w10: v1(2510,2814.99) 2475.03,2850.01 2475.03,3245.01 2805.03,3575.01 3155,3575 3235,3575 3285,3625 3285,3665 3245,3705 v1(3200,3704.99)
RA-02_SS: LORA.15 R13.1 R22.2 | length 2300.7
  Top Layer w10: v1(2425,3059.99) 2495.01,3059.99 2535,3020 R22.2 ; LORA.15 3786.15,3861.8 R13.1
  Top Layer w23.62: v1(3630,3864.99) 3633.21,3861.79 LORA.15
  Bottom Layer w23.62: v1(2425,3059.99) 2425,3530 2950,4055 3390,4055 3580,3865 v1(3630,3864.99)
RX1: RX_TX.3 U1.39 | length 605.7
  Top Layer w10: v1(2725,2509.99) 2725,2554.24 U1.39
  Bottom Layer w10: v1(2725,2509.99) 2765,2550 2840,2550 2905,2485 2905,2230 2865.39,2190.39 RX_TX.3
RX2: R28.1 U1.13 | length 227.5
  Top Layer w10: U1.13 2903.27,2870.16 2925,2885
  Top Layer w20: R28.1@2866.53,3026.41 2925.03,2968.01 2925,2885
S$10738: 
SCL1: R24.2 U1.42 | length 211.1
  Top Layer w11.81: R24.2 2642.03,2485.01 2745.02,2485.01 2785.23,2525.21 U1.42
SD_CS: MICROSD.2 R14.2 R18.2 | length 679.7
  Top Layer w10: v1(2555,3269.99) 2557.95,3267.05 R14.2 ; v1(2595,3189.99) 2770,3190 2825,3135 2877.04,3135 R18.2
  Top Layer w20: R14.2 2601.1,3273.15 MICROSD.2
  Bottom Layer w10: v1(2555,3269.99) 2555.03,3245.01 2595.03,3205.01 v1(2595,3189.99)
SD_MISO: MICROSD.7 R10.2 R16.2 | length 106.8
  Top Layer w20: MICROSD.7 2815,3325.12 R10.2 R16.2
SDA1: R23.2 U1.43 | length 406.5
  Top Layer w11.81: R23.2 v1(2530,2504.99) ; U1.43 2804.8,2505.19 v1(2805,2504.99)
  Bottom Layer w11.81: v1(2530,2504.99) 2570.06,2464.99 2764.99,2464.99 v1(2805,2504.99)
TX1: RX_TX.2 U1.38 | length 714
  Top Layer w10: v1(2690,2509.99) 2706.4,2526.39 U1.38
  Bottom Layer w10: v1(2690,2509.99) 2690.03,2545.01 2720.03,2575.01 2855.03,2575.01 2925.03,2505.01 2925,2310 ; RX_TX.2 2925.03,2165.01 2925.03,2310.01
TX2: R27.1 U1.12 | length 318.2
  Top Layer w10: U1.12 2934.66,2814.64 2955.03,2835.01
  Top Layer w20: R27.1@2866.53,3076.41 2955.03,2987.91 2955.03,2835.01
U1_3: C4.2 U1.3 X1.1 | length 271.1
  Top Layer w10: U1.3 3009.85,2626.09 3024.53,2611.41 3024.53,2556.22 ; C4.2 3014.53,2522.91 3014.53,2546.22 3024.53,2556.22 ; X1.1 3024.53,2556.22
U1_4: R32.2 U1.4 | length 176.6
  Top Layer w10: U1.4 3015.15,2645.8 3067.53,2593.41 R32.2
U1_5: C1.2 U1.5 X2.1 | length 528.8
  Top Layer w5: U1.5@2934.63,2665.51 2980.73,2665.51 3010.43,2694.82
  Top Layer w10: 3010.2,2694.9 3045.2,2694.9 3093.8,2646.3 3241.5,2646.3 X2.1@3301.5,2706.3 ; X2.1 3300.99,2706.41 C1.2
U1_6: R1.2 U1.6 | length 149.6
  Top Layer w10: U1.6@2939.83,2685.11 2975.13,2685.11 3004.93,2714.91 3010.23,2714.91 ; 3005.03,2715.01 3063.93,2715.01 R1.2
U1_22: C5.2 U1.22 | length 104.3
  Top Layer w10: U1.22 2726.1,2852.99 2740,2875
  Top Layer w20: 2740.03,2875.01 2750.03,2890.01 2750,2920 C5.2
U4_4: R3.2 U4.4 | length 113.1
  Top Layer w10: U4.4 2599.85,2205.15 2610,2195 2672.04,2195 R3.2
U4_9: C17.2 U4.9 | length 59.1
  Top Layer w10.16: U4.9 2706.93,2275.47 C17.2
U4_11: R4.2 U4.11 | length 55.7
  Top Layer w11.81: U4.11 2690.91,2314.84 R4.2
VB: D5.2 RX_TX.1 | length 111.5
  Top Layer w39.37: RX_TX.1 2963.82,2183.82 3012.4,2232.4 D5.2
VBAT: C30.1 D5.3 U1.1 | length 311.3
  Top Layer w10: U1.1 2944.25,2586.7 2964.53,2566.41
  Top Layer w20: 2969.53,2566.41 2970,2490 2970,2483.55 C30.1 2965,2455 3000,2420 3000,2378.63 D5.3
VIN: +_.2 F1.2 | length 428.4
  Top Layer w59.05: +_.2 3355.03,2915.01 3455.03,2815.01 3455.03,2782.22 3455.03,2725.01 3495.03,2700.01 3498.43,2698.41 F1.2
VIN_I: 5V.3 +3V3.3 C13.1 C14.2 C32.1 D6.1 F1.1 | length 758.3
  Top Layer w20: 5V.3@3425,3115 C32.1@3480,3230
  Top Layer w50: F1.1 3594.53,2824.41 F1.1@3599.53,2829.41
  Top Layer w59.05: 3430,3125 3572.04,3125.8 +3V3.3 ; F1.1 3749.58,2824.41 D6.1
  Top Layer w78.74: 3644.53,2861.41 3644.53,2996.41
VREF+: C9.2 C12.2 L1.2 U1.9 | length 240.7
  Top Layer w10: U1.9@2934.63,2744.22 2959.23,2744.22 2990.33,2775.41 3023.54,2808.55 C9.2
  Top Layer w20: L1.2 3002.44,2841.09 C9.2
X1_2: C2.2 R32.1 X1.2 | length 169
  Top Layer w10: R32.1 3169.72,2503.26 X1.2@3169.72,2501.41 ; X1.2 3206.19,2527.88 C2.2
X2_2: C33.2 R1.1 X2.2 | length 249
  Top Layer w10: R1.1 3071.57,2743.45 3094.53,2766.41 3169.53,2766.41 3169.53,2706.41 X2.2@3142.53,2706.41 ; 3117.81,2766.41 3148.07,2796.67 C33.2
pads on no net: LORA.6 LORA.7 LORA.8 LORA.10 LORA.11 MICROSD.1 MICROSD.8 MICROSD.10 MICROSD.12 MICROSD.13 MICROSD.14 U1.11 U1.14 U1.21 U1.25 U1.26 U1.34 U1.37 U1.40 U1.41 U1.45 U1.46 U3.7 U4.1 U4.7 U4.8 U4.12 U4.13 U4.14 U4.18 U4.21 U4.22 U4.23 U4.24

## Polygon pours and split planes (outlines as drawn)
+3V3 on Mid-Layer 2 (solid): 1500,4685 4450,4685 5040,4095 5040,1735 4835,1530 1585,1530 1555,1500
GND on Internal Plane 1 (split plane): 827 vertices, not listed, extent 1801.78,1558.35 4557.68,4314.24
GND on Internal Plane 1 (split plane): 205 vertices, not listed, extent 3094.9,1670.37 3264.55,1840.02
GND on Internal Plane 1 (split plane): 311 vertices, not listed, extent 2839.47,2139.07 2989.65,2190.92
GND on Internal Plane 1 (split plane): 18 vertices, not listed, extent 2826.1,2141.05 2840.13,2155.07
GND on Internal Plane 1 (split plane): 18 vertices, not listed, extent 2792.23,2141.05 2806.25,2155.07
GND on Internal Plane 1 (split plane): 18 vertices, not listed, extent 2826.1,2174.92 2840.13,2188.94
GND on Internal Plane 1 (split plane): 18 vertices, not listed, extent 2792.23,2174.92 2806.25,2188.94
GND on Internal Plane 1 (split plane): 96 vertices, not listed, extent 3851.25,2188.13 3887.82,2224.7
GND on Internal Plane 1 (split plane): 96 vertices, not listed, extent 3801.25,2188.13 3837.82,2224.7
GND on Internal Plane 1 (split plane): 157 vertices, not listed, extent 2556.72,2226.71 2593.29,2293.28
GND on Internal Plane 1 (split plane): 175 vertices, not listed, extent 3801.25,2228.13 3837.82,2299.7
GND on Internal Plane 1 (split plane): 96 vertices, not listed, extent 3851.25,2263.13 3887.82,2299.7
GND on Internal Plane 1 (split plane): 96 vertices, not listed, extent 2946.72,2281.71 2983.29,2318.28
GND on Internal Plane 1 (split plane): 96 vertices, not listed, extent 3421.72,2296.71 3458.29,2333.28
GND on Internal Plane 1 (split plane): 96 vertices, not listed, extent 3056.72,2301.71 3093.29,2338.28
GND on Internal Plane 1 (split plane): 96 vertices, not listed, extent 2756.72,2306.71 2793.29,2343.28
GND on Internal Plane 1 (split plane): 96 vertices, not listed, extent 2861.72,2311.71 2898.29,2348.28
GND on Internal Plane 1 (split plane): 96 vertices, not listed, extent 2821.72,2311.71 2858.29,2348.28
GND on Internal Plane 1 (split plane): 96 vertices, not listed, extent 3641.72,2321.71 3678.29,2358.28
GND on Internal Plane 1 (split plane): 96 vertices, not listed, extent 2601.72,2336.71 2638.29,2373.28
GND on Internal Plane 1 (split plane): 25 vertices, not listed, extent 2130.77,2338.84 2172.5,2380.57
GND on Internal Plane 1 (split plane): 25 vertices, not listed, extent 2267.5,2338.85 2309.22,2380.57
GND on Internal Plane 1 (split plane): 96 vertices, not listed, extent 3061.72,2346.71 3098.29,2383.28
GND on Internal Plane 1 (split plane): 96 vertices, not listed, extent 2936.72,2381.71 2973.29,2418.28
GND on Internal Plane 1 (split plane): 96 vertices, not listed, extent 2686.72,2391.71 2723.29,2428.28
GND on Internal Plane 1 (split plane): 96 vertices, not listed, extent 3066.72,2401.71 3103.29,2438.28
GND on Internal Plane 1 (split plane): 96 vertices, not listed, extent 2501.72,2431.71 2538.29,2468.28
GND on Internal Plane 1 (split plane): 81 vertices, not listed, extent 2822.02,2462.02 2847.97,2487.97
GND on Internal Plane 1 (split plane): 25 vertices, not listed, extent 2267.5,2475.57 2309.22,2517.28
GND on Internal Plane 1 (split plane): 25 vertices, not listed, extent 2130.77,2475.57 2172.5,2517.29
GND on Internal Plane 1 (split plane): 187 vertices, not listed, extent 2786.72,2486.71 2858.29,2533.28
GND on Internal Plane 1 (split plane): 96 vertices, not listed, extent 2511.72,2486.71 2548.29,2523.28
GND on Internal Plane 1 (split plane): 176 vertices, not listed, extent 2671.72,2491.71 2743.29,2528.28
GND on Internal Plane 1 (split plane): 96 vertices, not listed, extent 2913.15,2520.33 2949.72,2556.9
GND on Internal Plane 1 (split plane): 96 vertices, not listed, extent 3316.72,2546.71 3353.29,2583.28
GND on Internal Plane 1 (split plane): 96 vertices, not listed, extent 2556.25,2548.13 2592.82,2584.7
GND on Internal Plane 1 (split plane): 89 vertices, not listed, extent 2953.6,2585.49 2985.45,2617.34
GND on Internal Plane 1 (split plane): 140 vertices, not listed, extent 2124.75,2662.54 2203.44,2741.23
GND on Internal Plane 1 (split plane): 96 vertices, not listed, extent 2566.72,2711.71 2603.29,2748.28
GND on Internal Plane 1 (split plane): 140 vertices, not listed, extent 2236.57,2717.07 2315.26,2795.76
GND on Internal Plane 1 (split plane): 96 vertices, not listed, extent 3011.72,2731.71 3048.29,2768.28
GND on Internal Plane 1 (split plane): 96 vertices, not listed, extent 2491.72,2746.71 2528.29,2783.28
GND on Internal Plane 1 (split plane): 20 vertices, not listed, extent 2180.72,2775.28 2199.74,2794.3
GND on Internal Plane 1 (split plane): 19 vertices, not listed, extent 2128.43,2775.28 2147.45,2794.3
GND on Internal Plane 1 (split plane): 96 vertices, not listed, extent 2491.72,2796.71 2528.29,2833.28
GND on Internal Plane 1 (split plane): 96 vertices, not listed, extent 2956.72,2796.71 2993.29,2833.28
GND on Internal Plane 1 (split plane): 140 vertices, not listed, extent 2236.57,2826.12 2315.26,2904.81
GND on Internal Plane 1 (split plane): 20 vertices, not listed, extent 2180.72,2827.57 2199.74,2846.59
GND on Internal Plane 1 (split plane): 19 vertices, not listed, extent 2128.43,2827.57 2147.45,2846.59
GND on Internal Plane 1 (split plane): 129 vertices, not listed, extent 2772.02,2852.02 2817.97,2877.97
GND on Internal Plane 1 (split plane): 20 vertices, not listed, extent 2180.72,2884.34 2199.74,2903.36
GND on Internal Plane 1 (split plane): 19 vertices, not listed, extent 2128.43,2884.34 2147.45,2903.36
GND on Internal Plane 1 (split plane): 96 vertices, not listed, extent 3081.72,2906.71 3118.29,2943.28
GND on Internal Plane 1 (split plane): 96 vertices, not listed, extent 2551.72,2921.71 2588.29,2958.28
GND on Internal Plane 1 (split plane): 140 vertices, not listed, extent 2236.57,2935.18 2315.26,3013.87
GND on Internal Plane 1 (split plane): 20 vertices, not listed, extent 2180.72,2936.63 2199.74,2955.65
GND on Internal Plane 1 (split plane): 19 vertices, not listed, extent 2128.43,2936.63 2147.45,2955.65
GND on Internal Plane 1 (split plane): 144 vertices, not listed, extent 3313.49,2938.48 3396.51,3021.51
GND on Internal Plane 1 (split plane): 34 vertices, not listed, extent 3272.71,2938.58 3296.42,2962.29
GND on Internal Plane 1 (split plane): 34 vertices, not listed, extent 3213.58,2938.58 3237.28,2962.29
GND on Internal Plane 1 (split plane): 96 vertices, not listed, extent 3021.72,2961.71 3058.29,2998.28
GND on Internal Plane 1 (split plane): 227 vertices, not listed, extent 2802.02,2966.71 2887.97,3003.28
GND on Internal Plane 1 (split plane): 140 vertices, not listed, extent 2124.75,2989.71 2203.44,3068.4
GND on Internal Plane 1 (split plane): 34 vertices, not listed, extent 3213.58,2997.72 3237.28,3021.42
GND on Internal Plane 1 (split plane): 34 vertices, not listed, extent 3272.71,2997.72 3296.42,3021.42
GND on Internal Plane 1 (split plane): 96 vertices, not listed, extent 2596.72,3001.71 2633.29,3038.28
GND on Internal Plane 1 (split plane): 96 vertices, not listed, extent 2406.72,3041.71 2443.29,3078.28
GND on Internal Plane 1 (split plane): 140 vertices, not listed, extent 2236.57,3044.23 2315.26,3122.92
GND on Internal Plane 1 (split plane): 311 vertices, not listed, extent 2609.47,3084.07 2759.65,3135.92
GND on Internal Plane 1 (split plane): 18 vertices, not listed, extent 2596.1,3086.05 2610.13,3100.07
GND on Internal Plane 1 (split plane): 18 vertices, not listed, extent 2562.23,3086.05 2576.25,3100.07
GND on Internal Plane 1 (split plane): 121 vertices, not listed, extent 2124.84,3098.86 2203.34,3177.36
GND on Internal Plane 1 (split plane): 18 vertices, not listed, extent 2596.1,3119.92 2610.13,3133.94
GND on Internal Plane 1 (split plane): 18 vertices, not listed, extent 2562.23,3119.92 2576.25,3133.94
GND on Internal Plane 1 (split plane): 96 vertices, not listed, extent 2481.72,3136.71 2518.29,3173.28
GND on Internal Plane 1 (split plane): 96 vertices, not listed, extent 2831.72,3146.71 2868.29,3183.28
GND on Internal Plane 1 (split plane): 96 vertices, not listed, extent 3206.72,3161.71 3243.29,3198.28
GND on Internal Plane 1 (split plane): 96 vertices, not listed, extent 2576.72,3171.71 2613.29,3208.28
GND on Internal Plane 1 (split plane): 156 vertices, not listed, extent 3176.72,3241.71 3243.29,3278.28
GND on Internal Plane 1 (split plane): 96 vertices, not listed, extent 2536.72,3251.71 2573.29,3288.28
GND on Internal Plane 1 (split plane): 96 vertices, not listed, extent 2711.72,3266.71 2748.29,3303.28
GND on Internal Plane 1 (split plane): 25 vertices, not listed, extent 2130.77,3322.7 2172.5,3364.43
GND on Internal Plane 1 (split plane): 25 vertices, not listed, extent 2267.5,3322.71 2309.22,3364.43
GND on Internal Plane 1 (split plane): 96 vertices, not listed, extent 2626.72,3356.71 2663.29,3393.28
GND on Internal Plane 1 (split plane): 96 vertices, not listed, extent 2981.72,3421.71 3018.29,3458.28
GND on Internal Plane 1 (split plane): 25 vertices, not listed, extent 2267.5,3459.43 2309.22,3501.14
GND on Internal Plane 1 (split plane): 25 vertices, not listed, extent 2130.77,3459.43 2172.5,3501.15
GND on Internal Plane 1 (split plane): 205 vertices, not listed, extent 4079.15,3579.82 4248.8,3749.47
GND on Internal Plane 1 (split plane): 205 vertices, not listed, extent 2110.65,3579.82 2280.3,3749.47
GND on Internal Plane 1 (split plane): 96 vertices, not listed, extent 3595.87,3595.86 3632.44,3632.43
GND on Internal Plane 1 (split plane): 96 vertices, not listed, extent 3181.72,3611.71 3218.29,3648.28
GND on Internal Plane 1 (split plane): 96 vertices, not listed, extent 2916.72,3676.71 2953.29,3713.28
GND on Internal Plane 1 (split plane): 96 vertices, not listed, extent 3566.72,3686.71 3603.29,3723.28
GND on Internal Plane 1 (split plane): 96 vertices, not listed, extent 3181.72,3686.71 3218.29,3723.28
GND on Internal Plane 1 (split plane): 96 vertices, not listed, extent 3856.72,3686.71 3893.29,3723.28
GND on Internal Plane 1 (split plane): 96 vertices, not listed, extent 3616.72,3761.71 3653.29,3798.28
GND on Internal Plane 1 (split plane): 96 vertices, not listed, extent 3841.72,3841.71 3878.29,3878.28
GND on Internal Plane 1 (split plane): 96 vertices, not listed, extent 3611.72,3846.71 3648.29,3883.28

## Keep-outs
Keep-Out Layer:
  circle w10 net S$10738: c3179.73,2936.3 r1377.95

## Other copper
Top Layer:
  region net GND: 3609.53,3301.41 3609.53,3166.41 3729.53,3166.41 3734.53,3166.41 3734.53,3171.41 3734.53,3301.41
  region net +3V3: 3899.53,2191.41 3899.53,2296.41 3804.53,2296.41 3804.53,2191.41
  region net C27_1: 4144.53,2231.41 4144.53,2347.92 4109.53,2382.92 3956.03,2382.92 3949.53,2376.41 3949.53,2231.41
  region net GND: 3804.53,2576.41 3724.53,2576.41 3724.53,2731.41 3804.53,2731.41
  region net GND: 3399.53,2521.41 3424.53,2521.41 3439.53,2521.41 3449.53,2521.41 3506.91,2444.15 3506.91,2443.91 3447.14,2384.15 3449.53,2371.41 3424.53,2371.41 3399.53,2371.41

## Text inside footprints (layer, text, board x,y; h text height)
D-SUB-9: Top Overlay "1" at 2146.17,3229.91 h50 r270; Top Overlay "6" at 2258.98,3207.73 h50 r275; Top Overlay "9" at 2256.25,2587.74 h50 r275; Top Overlay "5" at 2146.18,2569.91 h50 r270
LORA: Top Overlay "LORa" at 3471.54,3704.36 h78.74 r270